# Altium PCB imx6_cpu_board.PcbDoc (part 8 of 9)
Units mil, origin at the board's own origin, x right, y up, seen from the top; angles counter-clockwise.
Board outline 2598.43 x 2362.2 mil, 8 copper layers (Top Layer, GND1, Signal Layer 1, POWER1, POWER2, Signal Layer 2, GND2, Bottom Layer), stack 66.304 mil thick; 354 components, 422 nets, 2180 pads, 1333 vias.
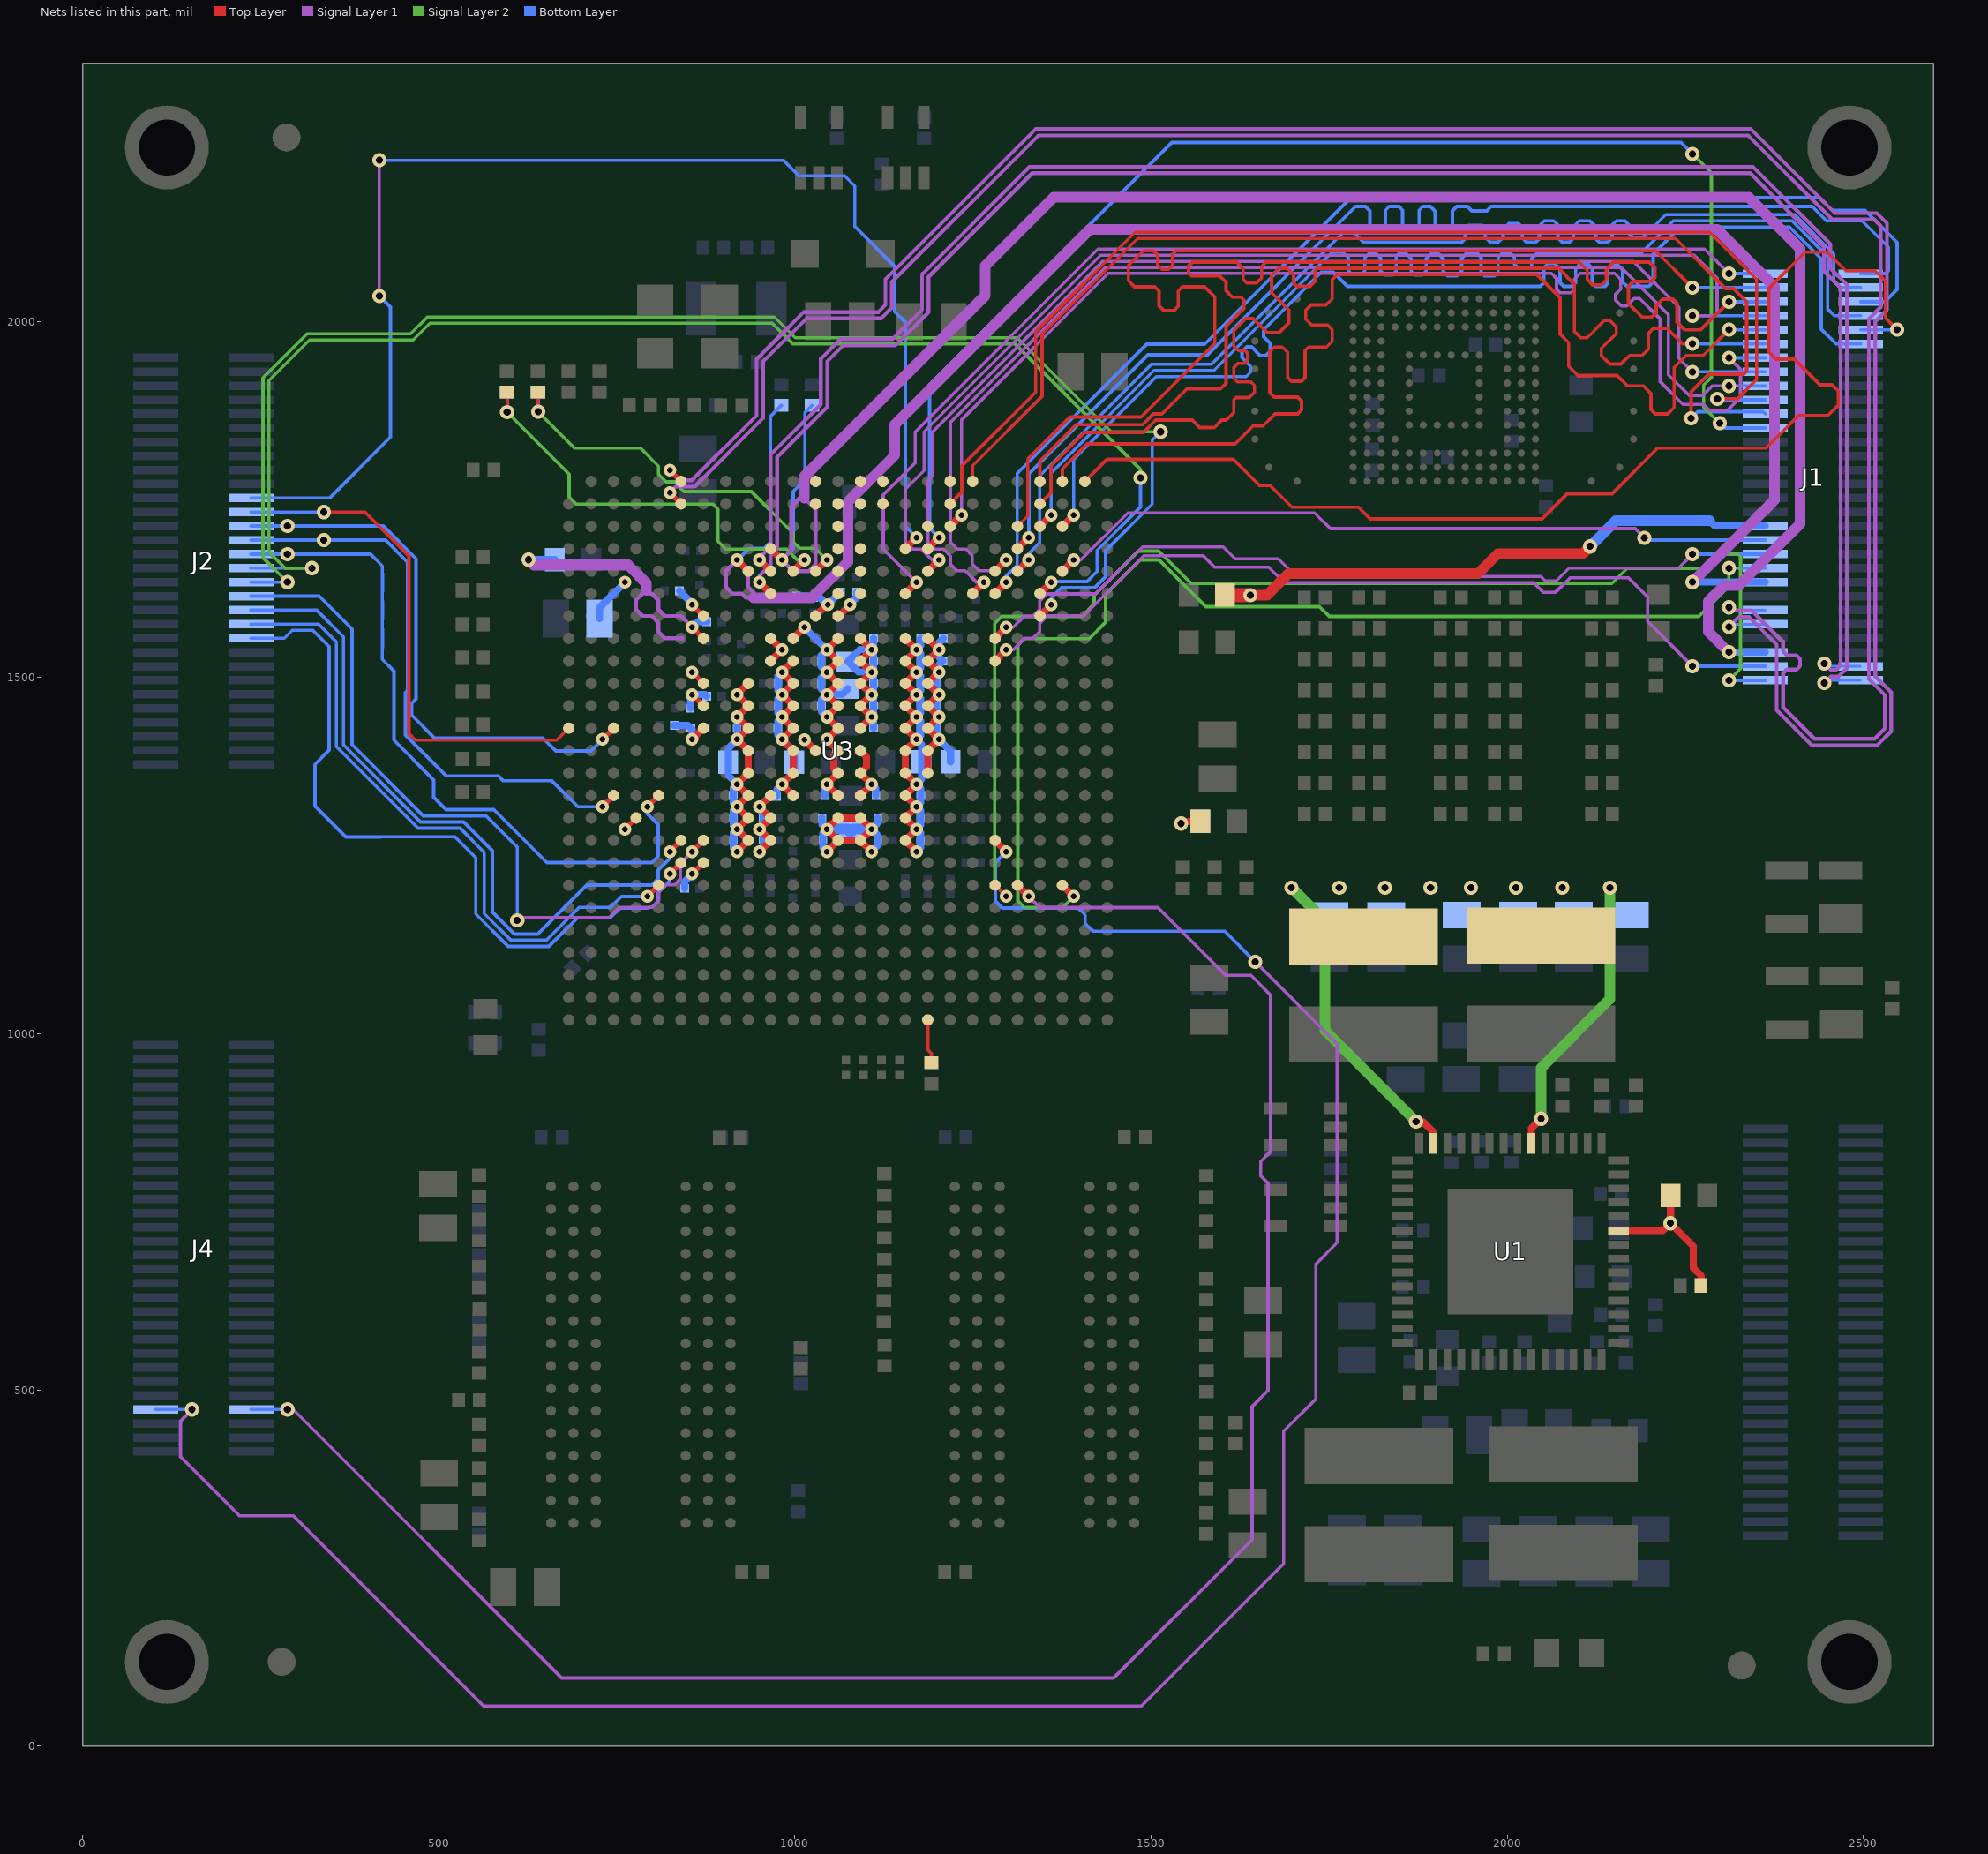
[diagram p14: the nets of this part, all layers, seen from the top]

## Via types
v1: diameter 18, hole 8, Top Layer to Bottom Layer, tented both sides, 768 vias
v2: diameter 20, hole 10, Top Layer to Bottom Layer, tented both sides, 565 vias

## Nets (pads, with @x,y where several pads share a name; then routed paths per layer and width w, separated by ;. In a path a pad name is that pad's centre, name@x,y a point inside that pad or via, vN(x,y) a via of type N, cw(c..) or ccw(c..) an arc to the next point about the centre after c; other vN are vias at no path point) (continued)
RGMII-TXCLK: J1.2 U3.D21 | length 1728.1
  Top Layer w10: U3.D21@1312.35,1680.8 v1(1328.1,1696.55)
  Bottom Layer w4.7: v1(1328.1,1696.55) 1328.1,1785.72 1495.38,1953 1579,1953 1787,2161 1801,2161 1807,2155 1807,2135 1813,2129 1823.46,2129 1829,2134.54 1829,2156 1834,2161 1848,2161 1853,2156 1853,2134 1859,2128 1869.46,2128 1876,2134.54 1876,2156 1881,2161 1892,2161 1898.58,2154.42 1898.58,2135.84 1905.42,2129 1916,2129 1923,2136 1923,2155 1929,2161 1944,2161 1950,2155 1971,2155 1977,2161 2428,2161 2448,2141 2498,2141 2535.03,2103.97 2535.03,2071.03 2530.93,2066.93 J1.2@2496.06,2066.93
RGMII-TXD0: J1.8 U3.C22 | length 1728.4
  Top Layer w10: U3.C22@1343.84,1712.3 v1(1359.59,1728.05)
  Bottom Layer w4.7: v1(1359.59,1728.05) 1359.59,1786.89 1503.8,1931.1 1588.1,1931.1 1754,2097 1769,2097 1777,2089 1777,2071.03 1782.33,2065.7 1794.7,2065.7 1800,2071 1800,2089 1806,2095 1816,2095 1822,2089 1822,2070.7 1827.7,2065 1838.2,2065 1844,2070.8 1844,2091 1848,2095 1857.97,2095 1865,2087.97 1865,2070 1870,2065 1880,2065 1886,2071 1886,2088 1893,2095 1903,2095 1910,2088 1910,2070 1916,2064 1929,2064 1935.86,2070.86 1935.86,2088.86 1942,2095 1958,2095 1963,2090 1963,2069 1968,2064 1982,2064 1987,2069 1987,2090 1992,2095 2005,2095 2010,2090 2010,2080 2015.65,2074.35 2030.35,2074.35 2034,2078 2034,2088 2041,2095 2186.95,2095 2233,2141.05 2399.72,2141.05 2449.52,2091.25 2449.52,2017.28 2458.93,2007.87 J1.8@2496.06,2007.87
RGMII-TXD1: J1.6 U3.F20 | length 1727.7
  Top Layer w10: U3.F20@1280.85,1617.81 v1(1296.6,1633.56)
  Bottom Layer w4.7: v1(1296.6,1633.56) 1296.6,1642.6 1311.95,1657.95 1311.95,1786.35 1493.6,1968 1575,1968 1781,2174 2437.73,2174 2455.73,2156 2502,2156 2547.24,2110.76 2547.24,2044.87 2529.93,2027.56 J1.6@2496.06,2027.56
RGMII-TXD2: J1.4 U3.E21 | length 1727.1
  Top Layer w10: U3.E21@1312.35,1649.31 v1(1328.1,1665.06)
  Bottom Layer w4.7: v1(1328.1,1665.06) 1328.1,1674.1 1343.45,1689.45 1343.45,1782.99 1500.27,1939.8 1584.5,1939.8 1769.7,2125 1784,2125 1798,2111 1936,2111 1941,2116 1941,2130 1945.54,2134.54 1964.46,2134.54 1969,2130 1969,2118 1976,2111 1987,2111 1994,2118 1994,2129 2002,2137 2016,2137 2021,2132 2021,2117 2027,2111 2040,2111 2045,2116 2045,2134 2052.05,2141.05 2064.95,2141.05 2071,2135 2071,2117 2077,2111 2087,2111 2093,2117 2093,2133 2101,2141 2115.54,2141 2124,2132.54 2124,2116 2129,2111 2141,2111 2147,2117 2147,2135.05 2152.95,2141 2165,2141 2172,2134 2172,2122 2177.85,2116.15 2188.75,2116.15 2222.3,2149.7 2403.3,2149.7 2458.4,2094.6 2458.4,2075.65 2458.22,2075.46 2458.22,2058.39 2458.4,2058.21 2458.4,2056.6 2467.76,2047.24 J1.4@2496.06,2047.24
RGMII-TXD3: J1.10 U3.A24 | length 1728.2
  Top Layer w4.7: U3.A24@1406.84,1775.29 1437.94,1806.39 1615.45,1806.39 1652.54,1769.3 1667.4,1769.3 1697.7,1739 1791,1739 1807.35,1722.65 2048.65,1722.65 2084,1758 2147,1758 2211,1822 2363.1,1822 2409.1,1868 2450,1868 2464.61,1882.61 2464.61,1902 2455.61,1911 2439,1911 2403,1947 2377,1947 2367,1957 2367,2046 2418,2097 2449,2097 2475,2071 2516,2071 2531,2056 2531,2004.43 v2(2547.24,1988.19)
  Bottom Layer w4.7: J1.10@2496.06,1988.19 v2(2547.24,1988.19)
RGMII-TXEN: J1.12 U3.C23 | length 1728.2
  Top Layer w10: U3.C23@1375.34,1712.3 v1(1391.09,1728.05)
  Bottom Layer w4.7: v1(1391.09,1728.05) 1391.09,1806.16 1507.33,1922.4 1633.4,1922.4 1639.5,1928.5 1639.5,1936.88 1627.35,1949.03 1627.35,1957.65 1633.85,1964.15 1640.87,1964.15 1653.02,1952 1661,1952 1667,1958 1667,1969 1657.7,1978.3 1657.7,1988 1738.7,2069 1755.6,2069 1775.6,2049 2046,2049 2051,2054 2051,2075 2057,2081 2066.75,2081 2074,2073.75 2074,2054 2079,2049 2091,2049 2096,2054 2096,2074 2102,2080 2113.75,2080 2119,2074.75 2119,2054 2124,2049 2137,2049 2141,2053 2141,2075 2145,2079 2154.93,2079 2162,2071.93 2162,2055 2168,2049 2198.65,2049 2204.72,2055.07 2204.72,2094.12 2243,2132.4 2396.13,2132.4 2440.82,2087.72 2440.82,1989.18 2461.5,1968.5 J1.12@2496.06,1968.5
RMII-PWR: J1.37 R9.1 | length 804.7
  Top Layer w15: v2(1639.2,1615.7) 1662.7,1615.7 1693,1646 1959,1646 1986.5,1673.5 2105.5,1673.5 v2(2116,1684)
  Top Layer w20: R9.1@1603.8,1615.7 v2(1639.2,1615.7)
  Bottom Layer w10: 2284,1720 2291.4,1712.6 J1.37@2362.2,1712.6
  Bottom Layer w15: v2(2116,1684) 2152,1720 2284,1720
SATA-RX_N: U3.A14
SATA-RX_P: U3.B14
SATA-TX_N: U3.B12
SATA-TX_P: U3.A12
SD2-CD-B: J1.1 U3.F16 | length 1585.3
  Top Layer w10: U3.F16@1154.87,1617.81 v1(1170.62,1633.56)
  Signal Layer 1 w4.5: v1(1170.62,1633.56) 1123.87,1680.31 1123.87,1756.49 1169,1801.62 1169,1844.88 1425.37,2101.25 2276.7,2101.25 v2(2311.02,2066.93)
  Bottom Layer w4.7: v2(2311.02,2066.93) J1.1@2362.2,2066.93
SD2-CLK: J1.3 U3.C21 | length 1662.6
  Top Layer w4.7: U3.C21@1312.35,1712.3 1326.7,1726.65 1326.7,1806.7 1385.9,1865.9 1485.85,1865.9 1589.45,1969.5 1589.45,2034 1574.88,2048.57 1544,2048.57 1538,2042.57 1538,2021 1532,2015 1518,2015 1511,2022 1511,2042.57 1505,2048.57 1476.46,2048.57 1468,2057.03 1468,2078 1489,2099 1503,2099 1509,2093 1509,2079 1515,2073 1524.39,2073 1530.37,2078.97 1530.37,2094.37 1535,2099 2208.09,2099 v2(2259.84,2047.24)
  Bottom Layer w4.7: v2(2259.84,2047.24) J1.3@2362.2,2047.24
SD2-CMD: J1.15 U3.F19 | length 1662.6
  Top Layer w10: U3.F19@1249.36,1617.81 v1(1265.11,1633.56)
  Signal Layer 1 w4.5: v1(1265.11,1633.56) 1255.18,1633.56 1238.93,1649.81 1227.29,1649.81 1218.36,1658.74 1218.36,1670.38 1208.43,1680.31 1196.78,1680.31 1186.86,1690.23 1186.86,1776.86 1193.27,1783.27 1193.27,1845.11 1432.42,2084.25 2176.52,2084.25 2241,2019.77 2241,1947.98 v2(2259.84,1929.13)
  Bottom Layer w4.7: v2(2259.84,1929.13) J1.15@2362.2,1929.13
SD2-DATA0: J1.5 U3.A22 | length 1662.5
  Top Layer w4.7: U3.A22@1343.84,1775.29 1343.84,1804.16 1394.68,1855 1487.87,1855 1502.82,1869.95 1514.95,1869.95 1550,1905 1597,1905 1605,1913 1605,1993 1630,2018 1630,2030 1626,2034 1614,2034 1605,2043 1605,2055 1596,2064 1557,2064 1552.62,2068.38 1552.62,2077.62 1558,2083 1620,2083 1629,2074 1629,2059 1634,2054 1648,2054 1655,2061 1655,2077 1661,2083 2100.75,2083 2112.18,2071.57 2112.18,2058.82 2120,2051 2132,2051 2139,2058 2139,2073 2149,2083 2199,2083 2207,2075 2207,2061.28 2201.72,2056 2177,2056 2170,2049 2170,2025 2189,2006 2203,2006 2209,2012 2209,2022 2218,2031 2232.39,2031 2238,2025.39 2238,1999 2248.81,1988.19 2271.65,1988.19 v2(2311.02,2027.56)
  Bottom Layer w4.7: v2(2311.02,2027.56) J1.5@2362.2,2027.56
SD2-DATA1: J1.17 U3.E20 | length 1661.9
  Top Layer w10: U3.E20@1280.85,1649.31 v1(1296.6,1665.06)
  Signal Layer 1 w4.5: v1(1296.6,1665.06) 1281.35,1649.81 1258.79,1649.81 1248.86,1659.74 1248.86,1671.38 1239.93,1680.31 1228.28,1680.31 1218.36,1690.23 1218.36,1858.17 1435.94,2075.75 2159.8,2075.75 2226.01,2009.54 2226.01,1924.99 2255,1896 2274.3,1896 2287.75,1909.45 v2(2311.02,1909.45)
  Bottom Layer w4.7: v2(2311.02,1909.45) J1.17@2362.2,1909.45
SD2-DATA2: J1.9 U3.A23 | length 1662
  Top Layer w4.7: U3.A23@1375.34,1775.29 1375.34,1793 1410.13,1827.79 1617.79,1827.79 1643,1853 1656.87,1853 1673.82,1869.95 1705.35,1869.95 1711,1875.6 1711,1888 1705.3,1893.7 1672.59,1893.7 1666.29,1900 1666.29,1957.41 1672.87,1964 1684,1964 1691.48,1956.52 1691.48,1921.52 1697,1916 1711,1916 1716,1921 1716,1959 1721,1964 1746,1964 1754,1972 1754,1988.19 1747.19,1995 1725,1995 1717,2003 1717,2015.48 1724.52,2023 1745.51,2023 1754,2031.49 1754,2058.5 1761.2,2065.7 2041.3,2065.7 2074,2033 2074,1982 2086,1970 2086,1937.15 2099.15,1924 2154,1924 2168.56,1909.44 2191,1909.44 2201.72,1898.73 2201.72,1876.28 2207.92,1870.08 2225.08,1870.08 2234,1879 2234,1935 2251.15,1952.15 2274.99,1952.15 v2(2311.02,1988.19)
  Bottom Layer w4.7: v2(2311.02,1988.19) J1.9@2362.2,1988.19
SD2-DATA3: J1.11 U3.B22 | length 1662.4
  Top Layer w4.7: U3.B22@1343.84,1743.8 1359.08,1759.04 1359.08,1796.72 1406.36,1844 1489.11,1844 1506.41,1861.3 1518.53,1861.3 1557.7,1861.3 1568,1851 1588.7,1851 1599,1861.3 1605.3,1861.3 1612,1868 1616,1872 1616,1890 1619,1893 1637.49,1893 1645,1900.51 1645,1910 1640,1915 1621,1915 1616,1920 1616,1935 1622,1941 1630.63,1941 1635.38,1945.75 1635.38,1955.12 1631.6,1958.9 1622.1,1958.9 1616,1965 1616,1987 1632.8,2003.8 1643.2,2003.8 1663,1984 1679.5,1984 1693,1997.5 1693,2016 1669,2040 1669,2064.25 1679.1,2074.35 1691,2074.35 1700,2065.35 1700,2053.61 1704.61,2049 1723,2049 1730,2056 1730,2071.35 1733,2074.35 2072,2074.35 2094,2052.35 2094,1986 2103,1977 2112,1977 2136,2001 2144,2001 2153,1992 2153,1983 2132,1962 2132,1952 2144.11,1939.89 2159.58,1939.89 2171.85,1952.15 2189,1952.15 2197.74,1960.89 2197.74,1982.93 2204.81,1990 2224.39,1990 2245.89,1968.5 v2(2259.84,1968.5)
  Bottom Layer w4.7: v2(2259.84,1968.5) J1.11@2362.2,1968.5
SD2-DATA4: J1.21 U3.A19 | length 1662.8
  Top Layer w4.7: U3.A19@1249.36,1775.29 1249.36,1797.36 1347,1895 1347,1982.39 1480.91,2116.3 2235.98,2116.3 2306.28,2046 2317.56,2046 2336,2027.56 2336,1930 2331.8,1925.8 2282.8,1925.8 2258,1901 v2(2258,1864)
  Bottom Layer w4.7: v2(2258,1864) 2267.35,1873.35 2358.93,1873.35 J1.21@2362.2,1870.08
SD2-DATA5: J1.19 U3.B18 | length 1662.2
  Top Layer w4.7: U3.B18@1217.86,1743.8 1234.3,1760.24 1234.3,1797.03 1338,1900.73 1338,1985.7 1477.3,2125 2284,2125 2350,2059 2350,1918.23 2322.77,1891 v2(2294.77,1891)
  Bottom Layer w4.7: v2@2296.01,1889.76 J1.19@2362.2,1889.76
SD2-DATA6: J1.7 U3.E17 | length 1662.4
  Top Layer w10: U3.E17@1186.36,1649.31 v1(1202.11,1665.06)
  Signal Layer 1 w4.5: v1(1202.11,1665.06) 1192.19,1665.06 1176.94,1680.31 1165.29,1680.31 1155,1690.61 1155,1764.52 1181,1790.52 1181,1844.85 1428.9,2092.75 2262.25,2092.75 2294.57,2060.43 2294.57,2011.1 2291.34,2007.87 v2(2259.84,2007.87)
  Bottom Layer w4.7: v2(2259.84,2007.87) J1.7@2362.2,2007.87
SD2-DATA7: J1.13 U3.C18 | length 1662.3
  Top Layer w10: U3.C18@1217.86,1712.3 v1(1233.61,1728.05)
  Signal Layer 1 w4.5: v1(1233.61,1728.05) 1233.61,1861.4 1439.46,2067.25 2062,2067.25 2069,2060.25 2069,2045 2074,2040 2089,2040 2094,2045 2094,2059.25 2102,2067.25 2150.54,2067.25 2159,2058.79 2159,2045 2152,2038 2152,2029.48 2159.69,2021.79 2167.79,2021.79 2178,2032 2185.79,2032 2214.63,2003.16 2214.63,1915.29 2246.6,1883.32 2275.63,1883.32 2284.2,1874.75 2308.77,1874.75 2327.27,1893.25 2327.27,1932.57 v2(2311.02,1948.82)
  Bottom Layer w4.7: v2(2311.02,1948.82) J1.13@2362.2,1948.82
SD2-WP: J1.23 U3.D17 | length 1930.5
  Top Layer w10: U3.D17@1186.36,1680.8 v1(1202.11,1696.55)
  Signal Layer 2 w4.5: v2(2260,2235) 2286.47,2208.53 2286.47,1921.47 2275.47,1910.47 2275.39,1910.47 2275.39,1879.61 v2(2298,1857)
  Bottom Layer w4.7: v1(1202.11,1696.55) 1189,1709.66 1189,1910.93 1529.07,2251 2244,2251 v2(2260,2235) ; v2(2298,1857) 2304.61,1850.39 J1.23@2362.2,1850.39
SD3-CD-B: U3.A18
SD3-CLK: U3.D14
SD3-CMD: U3.B13
SD3-DATA0: U3.E14
SD3-DATA1: U3.F14
SD3-DATA2: U3.A15
SD3-DATA3: U3.B15
SD3-DATA4: U3.D13
SD3-DATA5: U3.C13
SD3-DATA6: U3.E13
SD3-DATA7: U3.F13
SD3-WP: U3.C17
TAMPER: R45.1 R64.2 U3.E11 | length 627
  Top Layer w4.7: v2(595.86,1872.45) R45.1@595.86,1900.59
  Top Layer w10: U3.E11@997.39,1649.31 v1(1013.14,1665.06)
  Signal Layer 2 w4.5: v2(595.86,1872.45) 682.82,1785.49 682.82,1753.19 692.76,1743.25 884.74,1743.25 891.84,1736.16 891.84,1691.16 902.74,1680.26 987.92,1680.26 1003.12,1665.06 v1(1013.14,1665.06)
  Bottom Layer w4.7: v2(595.86,1872.45) R64.2@595.86,1900.59
TEST-MODE: R44.1 R67.2 U3.E12 | length 582.5
  Top Layer w4.5: v2@639.17,1873.25 v2(639.42,1873)
  Top Layer w4.7: v2@639.17,1873.25 R44.1@639.17,1900.59
  Top Layer w10: U3.E12@1028.88,1649.31 v1(1044.63,1665.06)
  Signal Layer 2 w4.5: v2(639.42,1873) 690.42,1822 783.2,1822 808.44,1796.76 808.44,1785.27 818.95,1774.75 830.45,1774.75 844.21,1761 938.69,1761 997.95,1701.74 997.95,1690.26 1006.85,1681.35 1028.34,1681.35 v1(1044.63,1665.06)
  Bottom Layer w4.7: R67.2@639.17,1900.59 639.17,1873.25 v2(639.42,1873)
UART1-RXD: J2.26 U3.M3 | length 790.5
  Top Layer w7: v1(729.67,1413.09) U3.M3@745.42,1428.84
  Bottom Layer w4.7: J2.26@236.22,1712.6 v2(287.4,1712.6) 421.95,1712.6 468,1666.55 468,1469.82 461.65,1463.47 461.65,1447.35 494,1415 646.14,1415 664.2,1396.94 713.52,1396.94 v1(729.67,1413.09)
UART1-TXD: J2.24 U3.M1 | length 731.8
  Top Layer w4.7: v2(338.58,1732.28) 396.29,1732.28 458,1670.57 458,1421.16 467,1412.16 665.74,1412.16 U3.M1@682.43,1428.84
  Bottom Layer w4.7: J2.24@236.22,1732.28 v2(338.58,1732.28)
UART2-RXD: J2.30 U3.R5 | length 1001
  Top Layer w7: v1(792.66,1318.6) U3.R5@808.41,1334.35
  Bottom Layer w4.7: J2.30@236.22,1673.23 v2(287.4,1673.23) 404.08,1673.23 420.65,1656.66 420.65,1646.23 420.75,1646.13 420.75,1620.87 420.65,1620.77 420.65,1607.23 420.75,1607.13 420.75,1581.68 420.65,1581.58 420.65,1568.03 420.75,1567.93 420.75,1542.31 420.65,1542.21 420.65,1525.35 437,1509 437,1412 492.93,1356.07 492.93,1331.83 510.11,1314.65 577.24,1314.65 651.63,1240.26 799.01,1240.26 808.01,1249.25 808.01,1293.46 792.66,1308.81 v1(792.66,1318.6)
UART2-TXD: J2.28 U3.R3 | length 817.4
  Top Layer w7: v1(729.67,1318.6) U3.R3@745.42,1334.35
  Bottom Layer w4.7: J2.28@236.22,1692.91 v2(338.58,1692.91) 425.09,1692.91 456,1662 456,1482 452.95,1478.95 452.95,1419.05 510,1362 583.42,1362 590.47,1354.95 658.89,1354.95 695.24,1318.6 v1(729.67,1318.6)
UART3-RXD: J2.34 U3.G22 | length 2070.3
  Top Layer w10: U3.G22@1343.84,1586.32 v1(1359.59,1602.07)
  Signal Layer 2 w4.5: v2(287.4,1633.86) 253.1,1668.16 253.1,1920.38 315.1,1982.37 460.37,1982.37 484,2006 971.29,2006 1000.33,1976.96 1312,1976.96 1443.96,1845 v2(1513.16,1845)
  Bottom Layer w4.7: J2.34@236.22,1633.86 v2(287.4,1633.86) ; v1(1359.59,1602.07) 1359.59,1611.85 1373.86,1626.12 1420.54,1626.12 1436,1641.58 1436,1678.09 1501.35,1743.44 1501.35,1833.19 v2(1513.16,1845)
UART3-TXD: J2.32 U3.F22 | length 1999.7
  Top Layer w10: U3.F22@1343.84,1617.81 v1(1359.59,1633.56)
  Signal Layer 2 w4.5: v2(322,1653.54) 284.11,1653.54 261.55,1676.1 261.55,1916.88 318.55,1973.87 463.89,1973.87 487.52,1997.5 967.77,1997.5 996.81,1968.46 1308.48,1968.46 1485,1791.94 v2(1485,1780.34)
  Bottom Layer w4.7: J2.32@236.22,1653.54 v2(322,1653.54) ; v1(1359.59,1633.56) 1360.85,1634.82 1410,1634.82 1424,1648.82 1424,1678.39 1485,1739.39 v2(1485,1780.34)
UART4-RXD: J2.42 U3.V6 | length 1059.3
  Top Layer w7: v1(824.16,1224.11) U3.V6@839.91,1239.86
  Bottom Layer w4.7: J2.42@236.22,1555.12 283,1555.12 294.18,1566.3 323,1566.3 346,1543.3 346,1397.95 326,1377.95 326,1319.65 369.7,1275.95 418.05,1275.95 418.45,1276.35 522.6,1276.35 552,1246.95 552,1168.12 597.6,1122.52 654.6,1122.52 695.08,1163 741.34,1163 754.81,1176.47 794.21,1176.47 795,1177.26 799.01,1177.26 808.01,1186.25 808.01,1198.18 824.16,1214.33 v1(824.16,1224.11)
UART4-TXD: J2.40 U3.W5 | length 924.3
  Top Layer w7: v1(792.66,1192.61) U3.W5@808.41,1208.36
  Bottom Layer w4.7: J2.40@236.22,1574.8 236.37,1574.95 331.05,1574.95 356.12,1549.88 356.12,1403.15 470.72,1288.55 529.78,1288.55 563.77,1254.56 563.77,1168.65 601.2,1131.22 651,1131.22 697.05,1177.27 741,1177.27 756.34,1192.61 v1(792.66,1192.61)
UART5-RXD: J2.38 U3.U6 | length 998.2
  Top Layer w7: v1(824.16,1255.61) U3.U6@839.91,1271.36
  Bottom Layer w4.7: J2.38@236.22,1594.49 328.51,1594.49 366,1557 366,1405.57 474.32,1297.25 534.75,1297.25 575.25,1256.75 575.25,1170.66 605.91,1140 639,1140 707.76,1208.76 799.01,1208.76 808.01,1217.75 808.01,1229.67 824.16,1245.82 v1(824.16,1255.61)
UART5-TXD: J2.36 U3.U7 | length 1045.2
  Top Layer w7: v1(855.65,1255.61) U3.U7@871.4,1271.36
  Signal Layer 1 w4.5: v2(610.04,1159) 614.04,1163 739,1163 753.37,1177.37 755.85,1177.37 799.11,1177.36 808.91,1187.16 808.91,1198.94 818.83,1208.86 830.47,1208.86 839.41,1217.79 839.41,1239.35 v1(855.65,1255.61)
  Bottom Layer w4.7: J2.36@236.22,1614.17 332,1614.17 378,1568.17 378,1405.88 477.93,1305.95 566.05,1305.95 610.04,1261.96 v2(610.04,1159)
USB-H1-OC: J1.57 U3.J20 | length 1250.6
  Top Layer w10: U3.J20@1280.85,1523.32 v1(1296.6,1539.07)
  Signal Layer 1 w4.5: v1(1296.6,1539.07) 1306.52,1539.07 1322.76,1555.31 1334.4,1555.31 1343.35,1564.26 1343.35,1575.9 1354.27,1586.82 1405.52,1586.82 1489.7,1671 1573,1671 1589,1655 1665,1655 1687,1633 2036.83,1633 2050.08,1619.75 2067.91,1619.75 2088.16,1640 2169.96,1640 2197,1612.96 2197,1578.59 v2(2259.84,1515.75)
  Bottom Layer w4.7: v2(2259.84,1515.75) J1.57@2362.2,1515.75
USB-HOST-VBUS: C121.1 J1.55 U3.D10 | length 2857.6
  Top Layer w10: U3.D10@965.89,1680.8 v1(981.64,1665.05)
  Signal Layer 1 w5.4: v1(981.64,1665.05) 997.33,1649.36 1019.64,1649.36 1028.85,1658.56 1028.85,1736.15 1013.15,1751.85
  Signal Layer 1 w6: v1(981.64,1665.05) 994.83,1678.24 994.83,1739.83 1006.85,1751.85 1013.15,1751.85
  Signal Layer 1 w15: 1013.15,1751.85 1013.15,1782.15 1267,2036 1267,2078 1363,2174 2339,2174 2411,2102 2411,1715.42 2324.58,1629 2304,1629 2282,1607 2282,1564.46 v2(2311.02,1535.43)
  Bottom Layer w4.7: v1(981.64,1665.05) 997.38,1680.79 997.38,1761.38 1014,1778 1014,1872.07 C121.1@1023.84,1881.91
  Bottom Layer w10: v2(2311.02,1535.43) J1.55@2362.2,1535.43
USB-HOST_N: J1.58 U3.F10 | length 2632.1
  Top Layer w10: v1(950.14,1633.56) U3.F10@965.89,1617.81
  Signal Layer 1 w5.3: v1(950.14,1633.56) 950.14,1642.69 966.04,1658.59 966.04,1671.51 975,1680.47 975,1809.27 1045.4,1879.67 1045.4,1943.88 1067.52,1966 1140.73,1966 1187.4,2012.67 1187.4,2062.4 1333,2208 2341,2208 2444.5,2104.5 2444.5,2070.5 2468,2047 2468,1517.4 2461,1510.4 2454.19,1510.4 v2(2444.88,1519.72)
  Bottom Layer w3.7: v2(2444.88,1519.72) 2448.85,1515.75 J1.58@2496.06,1515.75
USB-HOST_P: J1.60 U3.E10 | length 2641.6
  Top Layer w10: v1(950.14,1665.06) U3.E10@965.89,1649.31
  Signal Layer 1 w5.3: v1(950.14,1665.06) 950.14,1668.34 966,1684.2 966,1813 1036.4,1883.4 1036.4,1947.6 1063.8,1975 1137,1975 1178.4,2016.4 1178.4,2066.13 1178.88,2066.61 1329.27,2217 2344.73,2217 2450.86,2110.86 2453.5,2108.23 2453.5,2074.23 2477,2050.73 2477,1513.68 2464.73,1501.4 2454.19,1501.4 v2(2444.88,1492.09)
  Bottom Layer w3.7: v2(2444.88,1492.09) 2448.85,1496.06 J1.60@2496.06,1496.06
USB-OTG-ID: J1.43 U3.W23 | length 1667.4
  Top Layer w10: U3.W23@1375.34,1208.36 v1(1391.09,1192.61)
  Signal Layer 2 w4.5: v1(1391.09,1192.61) 1375.84,1177.36 1321.78,1177.36 1312.84,1186.3 1312.84,1545.39 1321.78,1554.32 1412.7,1554.32 1436,1577.62 1436,1616.79 1484.27,1665.06 1510.94,1665.06 1576.55,1599.45 1736.26,1599.45 1750,1585.71 2268.71,1585.71 2311.02,1628.02 v2(2311.02,1653.54)
  Bottom Layer w4.7: v2(2311.02,1653.54) J1.43@2362.2,1653.54
USB-OTG-OC: J1.41 U3.H20 | length 1176.8
  Top Layer w10: U3.H20@1280.85,1554.82 v1(1296.6,1570.57)
  Signal Layer 1 w4.5: v1(1296.6,1570.57) 1306.15,1570.57 1321.4,1585.82 1333.82,1585.82 1343.63,1595.63 1343.63,1607.67 1353.27,1617.32 1421.82,1617.32 1487.71,1683.21 1601.06,1683.21 1617.82,1666.45 1678.55,1666.45 1703,1642 2047.02,1642 2053.27,1635.75 2068.75,1635.75 2086.54,1653.54 2240.16,1653.54 v2(2259.84,1673.23)
  Bottom Layer w4.7: v2(2259.84,1673.23) J1.41@2362.2,1673.23
USB-OTG-PWREN: J1.39 U3.E23 | length 1036.6
  Top Layer w10: U3.E23@1375.34,1649.31 v1(1391.09,1665.06)
  Signal Layer 1 w4.5: v1(1391.09,1665.06) 1401.06,1665.06 1467.15,1731.15 1729.35,1731.15 1751.5,1709 2179.51,1709 v2(2192.51,1696)
  Bottom Layer w4.7: v2@2195.6,1692.91 J1.39@2362.2,1692.91
  Bottom Layer w10: v2(2192.51,1696) v2@2195.6,1692.91
USB-OTG-VBUS: C111.1 J1.45 U3.E9 | length 2749.9
  Top Layer w10: v1(918.65,1665.06) U3.E9@934.4,1649.31
  Signal Layer 1 w5.4: 902.95,1627.06 912.15,1617.86 925.06,1617.86 930.93,1612 941.94,1612 941.94,1619.56 934.44,1627.06 934.44,1649.27 v1(918.65,1665.06) 902.95,1649.36 902.95,1627.06
  Signal Layer 1 w15: 941.94,1612 1024,1612 1074.12,1662.12 1074.12,1746.12 1140.13,1812.13 1140.13,1855.29 1413.84,2129 2294.57,2129 2375,2048.57 2375,1749.02 v2(2259.84,1633.86)
  Bottom Layer w4.7: v1(918.65,1665.06) 919.44,1665.06 935.58,1681.2 956.51,1681.2 965.51,1690.19 965.51,1866.49 C111.1@980.93,1881.91
  Bottom Layer w10: v2(2259.84,1633.86) J1.45@2362.2,1633.86
USB-OTG_N: J1.49 U3.B6 | length 3215.2
  Top Layer w7: v1(824.16,1759.55) U3.B6@839.91,1743.8
  Signal Layer 1 w5.3: v1(824.16,1759.55) 832.6,1768 859.11,1768 955,1863.89 955,1943 1016,2004 1120.71,2004 1135.92,2019.21 1135.92,2055.19 1341.73,2261 2338,2261 2456,2143 2515,2143 2524,2134 2524,2019.81 2507.49,2003.3 2507.49,1497.87 2529.8,1475.57 2529.8,1428.13 2515.67,1414 2431,1414 2387,1458 2387,1506 2392,1511 2406,1511 2411,1516 2411,1526 2406,1531 2393,1531 2387,1537 2387,1550 2343,1594 2315.48,1594 v2(2311.02,1598.46)
  Bottom Layer w3.7: v2(2311.02,1598.46) 2314.99,1594.49 J1.49@2362.2,1594.49
USB-OTG_P: J1.51 U3.A6 | length 3215.7
  Top Layer w7: v1(824.16,1791.04) U3.A6@839.91,1775.29
  Signal Layer 1 w5.3: v1(824.16,1791.04) 838.2,1777 855.38,1777 946,1867.62 946,1946.73 971.27,1972 1012.27,2013 1116.98,2013 1126.92,2022.94 1126.92,2058.92 1338,2270 2341.73,2270 2459.73,2152 2518.73,2152 2533,2137.73 2533,2016.08 2516.49,1999.57 2516.49,1501.6 2538.8,1479.3 2538.8,1424.4 2519.4,1405 2427.27,1405 2380.64,1451.64 2378,1454.27 2378,1546.27 2339.27,1585 2325.19,1585 v2(2311.02,1570.83)
  Bottom Layer w3.7: v2(2311.02,1570.83) 2314.99,1574.8 J1.51@2362.2,1574.8
USB_H1_PWR_EN: J1.59 U3.W20 | length 1777.6
  Top Layer w4.7: U3.W20@1280.85,1208.36 v1(1296.6,1192.62)
  Signal Layer 2 w4.5: v1(1296.6,1192.62) 1280.36,1208.86 1280.36,1575.9 1290.28,1585.82 1402.82,1585.82 1420,1603 1420,1615.5 1482,1677.5 1510.52,1677.5 1556.07,1631.95 2146.64,1631.95 2167.69,1653 2274.62,1653 2294.85,1673.23 2323.77,1673.23 2327.27,1669.73 2327.27,1512.31 v2(2311.02,1496.06)
  Bottom Layer w4.7: v2(2311.02,1496.06) J1.59@2362.2,1496.06
VADC1-INT: J4.54 U3.W21 | length 2844.7
  Top Layer w10: U3.W21@1312.35,1208.36 v1(1328.1,1192.61)
  Signal Layer 1 w4.5: v2(287.4,472.44) 295.56,472.44 672.4,95.6 1447.31,95.6 1641.63,289.93 1641.63,476.63 1664,499 1664,790.19 1653.81,800.38 1653.81,820.66 1667.66,834.51 1667.66,1054.22 1640,1081.88 1604.49,1081.88 1509.38,1177 1343.71,1177 v1(1328.1,1192.61)
  Bottom Layer w4.7: J4.54@236.22,472.44 v2(287.4,472.44)
VADC2-INT: J4.53 U3.U20 | length 3329.5
  Top Layer w10: U3.U20@1280.85,1271.36 v1(1296.6,1255.61)
  Signal Layer 1 w4.5: v2(153.54,472.44) 137.29,456.19 137.29,406.18 220.47,323 296,323 563,56 1486,56 1686,256 1686,442 1731,487 1731,676.59 1761,706.59 1761,986 v2(1646,1101)
  Bottom Layer w4.7: J4.53@102.36,472.44 v2(153.54,472.44) ; v1(1296.6,1255.61) 1281.25,1240.26 1281.25,1186.27 1291.04,1176.47 1397.45,1176.47 1407.23,1166.69 1407.23,1154.77 1418,1143.99 1603.01,1143.99 v2(1646,1101)
VCOREDIG: C2.1 R5.1 U1.51 | length 221.5
  Top Layer w10: U1.51@2156.02,723.67 2218.54,723.67 v2(2228.77,733.9) ; C2.1@2229.17,772.88 2229.17,734.3 v2(2228.77,733.9) ; R5.1@2272.08,646.5 2272.08,660.05 2261,671.14 2261,701.68 v2(2228.77,733.9)
VDDARM-CAP: C38.1 C39.1 C40.1 C41.1 C42.1 C50.1 C51.1 C52.1 C53.1 C54.1 U3.H11 U3.H13 U3.J11 U3.J13 U3.K11 U3.K13 U3.L11 U3.L13 U3.M11 U3.M13 U3.N11 U3.N13 U3.P11 U3.P13 U3.R11 U3.R13 | length 994.3
  Top Layer w10: U3.R11@997.39,1334.35 v1(981.64,1350.1) U3.P11@997.39,1365.84 U3.N11@997.39,1397.34 v1(981.64,1413.09) U3.M11@997.39,1428.84 v1(981.64,1444.58) U3.L11@997.39,1460.33 v1(981.64,1476.08) U3.K11@997.39,1491.83 v1(981.64,1507.58) U3.J11@997.39,1523.32 ; U3.H11@997.39,1554.82 v1(1013.15,1570.57) ; U3.R13@1060.38,1334.35 v1(1044.63,1350.1) U3.P13@1060.38,1365.84 1054.38,1371.84 1054.38,1391.34 U3.N13@1060.38,1397.34 v1(1044.63,1413.09) U3.M13@1060.38,1428.84 v1(1044.63,1444.58) U3.L13@1060.38,1460.33 v1(1044.63,1476.08) U3.K13@1060.38,1491.83 v1(1044.63,1507.58) U3.J13@1060.38,1523.32 v1(1044.63,1539.07) U3.H13@1060.38,1554.82
  Bottom Layer w10: C51.1@974.38,1333 974.38,1342.84 v1(981.64,1350.1) 999.09,1367.55 C42.1@999.09,1381.12 999.09,1395.64 v1(981.64,1413.09) 975.81,1418.92 C53.1@975.81,1428.76 975.81,1438.76 v1(981.64,1444.58) 976.2,1450.02 C40.1@976.2,1460.26 976.2,1470.65 v1(981.64,1476.08) 976.2,1481.52 C52.1@976.2,1491.75 976.2,1502.15 v1(981.64,1507.58) ; v1(1013.15,1570.57) v1(1044.63,1539.07) 1036.83,1531.28 C39.1@1036.83,1523.25 1036.83,1515.38 v1(1044.63,1507.58) 1036.83,1499.79 C38.1@1036.83,1491.75 1036.83,1483.88 v1(1044.63,1476.08) ; C50.1@1042.24,1333.85 1042.24,1347.71 v1(1044.63,1350.1) ; v1(1044.63,1444.58) 1037.23,1451.98 C41.1@1037.23,1460.26 1037.23,1468.68 v1(1044.63,1476.08) ; C54.1@1074.24,1483.88 1066.44,1476.08 v1(1044.63,1476.08)
VDDARM-SW1AB: C14.1 C15.1 C16.1 C17.1 C43.1 C44.1 C45.1 C46.1 C47.1 C48.1 C49.1 C55.1 C56.1 C57.1 C58.1 C59.1 L2.2 U1.6 U3.H14 U3.J14 U3.K9 U3.K14 U3.L9 U3.L14 U3.M9 U3.M14 U3.N9 U3.N14 U3.P9 U3.P14 U3.R9 U3.R14 U3.T9 U3.U9 | length 1432.2
  Top Layer w10: v1(918.65,1255.61) U3.U9@934.4,1271.36 v1(918.65,1287.1) U3.T9@934.4,1302.85 v1(918.65,1318.6) U3.R9@934.4,1334.35 v1(918.65,1350.1) U3.P9@934.4,1365.84 U3.N9@934.4,1397.34 v1(918.65,1413.09) U3.M9@934.4,1428.84 v1(918.65,1444.58) U3.L9@934.4,1460.33 v1(918.65,1476.08) U3.K9@934.4,1491.83 ; U3.R14@1091.88,1334.35 v1(1107.62,1350.1) ; U3.N14@1091.88,1397.34 1100.38,1388.84 1100.38,1374.34 U3.P14@1091.88,1365.84 v1(1107.62,1350.1) ; U3.M14@1091.88,1428.84 v1(1107.62,1444.58) U3.L14@1091.88,1460.33 v1(1107.62,1476.08) U3.K14@1091.88,1491.83 v1(1107.62,1507.58) U3.J14@1091.88,1523.32 v1(1107.62,1539.07) U3.H14@1091.88,1554.82 ; U1.6@2033.9,845.79 2033.9,867.29 v2(2047.28,880.67)
  Signal Layer 2 w15: v2(2047.28,880.67) 2047.28,951.91 2143.85,1048.48 v2(2143.85,1205)
  Bottom Layer w10: v1(918.65,1255.61) 913.61,1260.66 C58.1@913.61,1271.28 913.61,1282.06 v1(918.65,1287.1) 913.61,1292.15 C57.1@913.61,1302.78 913.61,1313.56 v1(918.65,1318.6) 913.21,1324.04 C44.1@913.21,1334.27 913.21,1344.67 v1(918.65,1350.1) 906.28,1362.48 C49.1@906.28,1381.12 906.28,1400.72 v1(918.65,1413.09) 918.72,1413.17 C43.1@918.72,1428.76 918.72,1444.51 v1(918.65,1444.58) ; v1(1107.62,1350.1) 1113.61,1344.12 C56.1@1113.61,1334.27 ; C45.1@1110.3,1428.76 1110.3,1441.9 v1(1107.62,1444.58) 1110.3,1447.27 C47.1@1110.3,1460.26 1110.3,1473.4 v1(1107.62,1476.08) 1110.3,1478.77 C48.1@1110.3,1491.75 1110.3,1504.9 v1(1107.62,1507.58) ; C55.1@1110.3,1554.75 1110.3,1541.76 v1(1107.62,1539.07) ; v1(1107.62,1507.58) 1089.11,1507.58 C59.1@1074.24,1522.46 1090.85,1539.07 v1(1107.62,1539.07) ; v1(1107.62,1507.58) 1110.3,1510.27 C46.1@1110.3,1523.25 1110.3,1536.39 v1(1107.62,1539.07)
  other v2: 1949,1205 2012,1205 2077.09,1205
VDDHIGH-CAP: C87.1 C88.1 C89.1 C94.2 C110.1 C116.1 C123.1 C125.1 U3.G7 U3.G12 U3.H10 U3.J10 U3.K7 U3.M7 U3.V7 | length 389.9
  Top Layer w7: v1(855.65,1224.11) U3.V7@871.4,1239.86 ; v1(855.65,1507.58) U3.K7@871.4,1491.83 ; v1(855.65,1602.07) U3.G7@871.4,1586.32
  Top Layer w10: v1(855.65,1413.09) U3.M7@871.4,1428.84 ; U3.J10@965.89,1523.32 v1(981.65,1539.07) U3.H10@965.89,1554.82 ; U3.G12@1028.88,1586.32 1044.63,1602.07 v1(1046,1602) v1(1046,1602)
  Bottom Layer w10: C89.1@725.81,1582.7 725.81,1598.21 v1(761.17,1633.56) ; C116.1@830.54,1432.7 849.83,1432.7 C87.1@853.76,1428.76 855.65,1426.88 v1(855.65,1413.09) ; C125.1@837.62,1621.67 855.65,1603.65 v1(855.65,1602.07) ; C123.1@845.1,1203.96 845.1,1213.57 v1(855.65,1224.11) ; C94.2@1002.34,1614.19 1024.24,1614.19 C88.1@1026.2,1612.23 1034.48,1612.23 1044.7,1602 1045.9,1602 v1(1046,1602) C110.1@1064,1620.1
VDDPU-CAP: C78.1 C79.1 C80.1 C81.1 C82.1 C83.1 U3.H17 U3.J17 U3.K17 U3.L17 U3.M17 U3.N17 U3.P17 | length 448.9
  Top Layer w10: U3.P17@1186.36,1365.84 U3.N17@1186.36,1397.34 v1(1202.11,1413.09) U3.M17@1186.36,1428.84 v1(1202.11,1444.58) U3.L17@1186.36,1460.33 v1(1202.11,1476.08) U3.K17@1186.36,1491.83 v1(1202.11,1507.58) U3.J17@1186.36,1523.32 v1(1202.11,1539.07) U3.H17@1186.36,1554.82
  Bottom Layer w10: C78.1@1208.09,1554.75 1202.11,1548.76 v1(1202.11,1539.07) 1202.11,1528.84 C80.1@1207.7,1523.25 1202.11,1517.66 v1(1202.11,1507.58) 1199.04,1504.52 C81.1@1199.04,1491.75 1199.04,1479.15 v1(1202.11,1476.08) 1199.04,1473.02 C82.1@1199.04,1460.26 1199.04,1447.65 v1(1202.11,1444.58) 1199.04,1441.52 C79.1@1199.04,1428.76 1199.04,1416.16 v1(1202.11,1413.09) 1218.33,1396.87 C83.1@1218.33,1381.52
VDDSOC-CAP: C60.1 C61.1 C62.1 C63.1 C64.1 C65.1 C66.1 C86.1 C109.1 C113.1 C122.1 L5.1 U3.G13 U3.H7 U3.L7 U3.N12 U3.R10 U3.T10 U3.T13 U3.T14 U3.U10 U3.U13 U3.U14 | length 1179.1
  Top Layer w7: v1(855.65,1476.08) U3.L7@871.4,1460.33 ; v1(855.65,1570.57) U3.H7@871.4,1554.82
  Top Layer w10: v1(950.14,1255.61) U3.U10@965.89,1271.36 v1(950.14,1287.1) U3.T10@965.89,1302.85 v1(950.14,1318.6) U3.R10@965.89,1334.35 ; v1(1013.14,1412.85) 1028.65,1397.34 U3.N12@1028.88,1397.34 ; v1(1044.63,1255.61) U3.U13@1060.38,1271.36 ; U3.G13@1060.38,1586.32 1061.61,1586.32 v1(1077.24,1601.96) ; v1(1107.62,1255.61) U3.U14@1091.88,1271.36 ; U3.U13@1060.38,1271.36 U3.U14@1091.88,1271.36 ; U3.U13@1060.38,1271.36 v1(1044.63,1287.1) U3.T13@1060.38,1302.85 U3.T14@1091.88,1302.85 v1(1107.62,1287.1) U3.U14@1091.88,1271.36
  Signal Layer 1 w5.5: 842,1554.58 841.71,1554.87 817.66,1554.87 808.46,1564.07 808.46,1576.97 799.06,1586.37 786.16,1586.37 776.96,1595.57 776.96,1608.58 786.16,1617.77 786.63,1617.77 791.38,1622.52 796.13,1617.77 799.16,1617.77 808.46,1608.48 808.46,1595.57 817.66,1586.37 839.85,1586.37 v1(855.65,1570.57)
  Signal Layer 1 w15: v2(625.81,1665.38) 633.19,1658 765.65,1658 791.38,1632.27 791.38,1622.52
  Bottom Layer w10: v2(625.81,1665.38) L5.1@662.82,1665.38 ; C113.1@852.98,1456.71 852.98,1473.41 v1(855.65,1476.08) 873.76,1476.08 C86.1@876.2,1473.64 ; v1(855.65,1570.57) 863.44,1578.37 C122.1@876.2,1578.37 ; v1(950.14,1255.61) 955.34,1260.81 C61.1@955.34,1271.28 955.34,1281.9 v1(950.14,1287.1) 955.34,1292.3 C63.1@955.34,1302.78 955.34,1313.4 v1(950.14,1318.6) ; C60.1@1038.02,1303.17 1038.02,1293.72 v1(1044.63,1287.1) 1039.2,1281.67 C62.1@1039.2,1271.28 1039.2,1261.05 v1(1044.63,1255.61) ; v1@1076.24,1601.96 1076.74,1602.46 1086.83,1612.55 C109.1@1086.83,1620.1 ; v1(1107.62,1255.61) 1115.97,1263.96 C65.1@1115.97,1271.28 1115.97,1278.75 v1(1107.62,1287.1) 1115.97,1295.45 C64.1@1115.97,1302.78
  Bottom Layer w15: v1(1044.63,1287.1) 1073.77,1287.1 C66.1@1078.17,1282.7 1082.58,1287.1 v1(1107.62,1287.1)
VDDSOC-SW1C: C28.1 C29.1 C67.1 C68.1 C69.1 C70.1 C71.1 C72.1 C73.1 C74.1 C75.1 C76.1 C77.1 L3.2 U1.13 U3.H16 U3.J16 U3.K16 U3.L16 U3.M16 U3.N16 U3.P16 U3.R16 U3.T16 U3.U16 | length 1254
  Top Layer w10: U3.H16@1154.87,1554.82 v1(1170.62,1539.07) U3.J16@1154.87,1523.32 v1(1170.62,1507.58) U3.K16@1154.87,1491.83 v1(1170.62,1476.08) U3.L16@1154.87,1460.33 v1(1170.62,1444.58) U3.M16@1154.87,1428.84 v1(1170.62,1413.09) U3.N16@1154.87,1397.34 U3.P16@1154.87,1365.84 v1(1170.61,1350.1) U3.R16@1154.87,1334.35 v1(1170.62,1318.6) U3.T16@1154.87,1302.85 v1(1170.62,1287.1) U3.U16@1154.87,1271.36 v1(1170.62,1255.61) ; v2@1542.35,1295 v2(1542,1295) 1545,1298 C77.1@1568.82,1298 ; v2(1871.76,876.79) 1881.41,876.79 1896.1,862.1 U1.13@1896.1,845.79
  Signal Layer 2 w15: v2(1697,1205) 1744,1158 1744,1004.55 v2(1871.76,876.79)
  Bottom Layer w10: v1(1170.62,1255.61) 1176.2,1261.2 C67.1@1176.2,1270.89 1176.2,1281.52 v1(1170.62,1287.1) 1176.2,1292.69 C73.1@1176.2,1302.78 1176.2,1313.02 v1(1170.62,1318.6) 1176.6,1324.58 C74.1@1176.6,1334.27 1176.6,1344.11 v1(1170.61,1350.1) 1177.78,1357.28 C75.1@1177.78,1381.52 1177.78,1405.93 v1(1170.62,1413.09) 1176.2,1418.68 C68.1@1176.2,1428.76 1176.2,1439 v1(1170.62,1444.58) 1176.2,1450.17 C72.1@1176.2,1460.26 1176.2,1470.5 v1(1170.62,1476.08) 1176.2,1481.67 C69.1@1176.2,1491.75 1176.2,1502 v1(1170.62,1507.58) 1176.2,1513.17 C70.1@1176.2,1523.25 1176.2,1533.49 v1(1170.62,1539.07) 1176.2,1544.66 C71.1@1176.2,1554.75 ; v2(1542,1295) 1545,1298 C76.1@1568.82,1298
  other v2: 1764,1205 1828,1205 1892.24,1205
WDOG-B: U3.T4 | length 22.3
  Top Layer w7: v1(761.17,1287.1) U3.T4@776.92,1302.85
WIFI-PWREN: J2.22 U3.D16 | length 1860.3
  Top Layer w10: U3.D16@1154.87,1680.8 v1(1170.62,1696.55)
  Signal Layer 1 w4.5: v2(416.35,2035.65) v2(416.35,2226)
  Bottom Layer w4.7: J2.22@236.22,1751.97 346.41,1751.97 432,1837.55 432,2020 v2(416.35,2035.65) ; v2(416.35,2226) 984,2226 1005.7,2204.3 1069.7,2204.3 1084,2190 1084,2133.13 1140,2077.13 1140,2013.45 1155.27,1998.18 1155.27,1711.9 v1(1170.62,1696.55)
ZQPAD: R40.1 U3.AE17 | length 62.4
  Top Layer w4.7: U3.AE17@1186.36,1019.39 1186.36,977.36 1191.38,972.34 R40.1@1191.38,959.1
pads on no net: Designator13. Designator14. Designator15. Designator16. Designator17. Designator18. J1.25 J1.26 J1.27 J1.29 J1.31 J1.33 J1.35 J1.40 J1.42 J1.44 J1.46 J1.48 J1.50 J2.14 J2.15 J4.1 J4.3 J4.5 J4.6 J4.7 J4.8 J4.9 J4.10 J4.11 J4.12 J4.13 J4.14 J4.15 J4.16 J4.17 J4.18 J4.19 J4.20 J4.21 J4.22 J4.24 J4.26 J4.28 U1.2 U1.16 U1.17 U1.18 U1.19 U1.21 U1.26 U1.27 U1.28 U1.33 U1.39 U1.44 U1.46 U3.A9 U3.A10 U3.A11 U3.A21 U3.AA1 U3.AA2 U3.AA3 U3.AA4 U3.AA11 U3.AB1 U3.AB2 U3.AB17 U3.AD17 U3.B8 U3.B9 U3.B10 U3.B11 U3.B21 U3.C5 U3.C8 U3.C15 U3.D1 U3.D2 U3.D5 U3.D20 U3.E1 U3.E2 U3.E3 U3.E4 U3.E15 U3.F1 U3.F2 U3.F3 U3.F4 U3.G1 U3.G2 U3.H1 U3.H2 U3.H3 U3.H4 U3.H19 U3.H24 U3.J23 U3.J24 U3.N19 U3.N22 U3.R2 U3.R20 U3.R21 U3.T22 U3.T23 U3.T24 U3.T25 U3.U25 U3.W4 U3.W6 U3.Y1 U3.Y2 U3.Y3 U3.Y4 U7.J1 U7.J9 U7.L1 U7.L9 U8.J1 U8.J9 U8.L1 U8.L9 U9.J1 U9.J9 U9.L1 U9.L9 U10.J1 U10.J9 U10.L1 U10.L9 U11.A4 U11.A6 U11.A9 U11.A11 U11.AA1 U11.AA2 U11.AA7 U11.AA8 U11.AA9 U11.AA10 U11.AA11 U11.AA12 U11.AA13 U11.AA14 U11.AE1 U11.AE14 U11.AG2 U11.AG13 U11.AH4 U11.AH6 U11.AH9 U11.AH11 U11.B2 U11.B13 U11.D1 U11.D14 U11.H1 U11.H2 U11.H6 U11.H7 U11.H8 U11.H9 U11.H10 U11.H11 U11.H12 U11.H13 U11.H14 U11.J1 U11.J7 U11.J8 U11.J9 U11.J10 U11.J11 U11.J12 U11.J13 U11.J14 U11.K1 U11.K3 U11.K5 U11.K7 U11.K8 U11.K9 U11.K10 U11.K11 U11.K12 U11.K13 U11.K14 U11.L1 U11.L2 U11.L3 U11.L4 U11.L12 U11.L13 U11.L14 U11.M1 U11.M2 U11.M3 U11.M5 U11.M8 U11.M9 U11.M10 U11.M12 U11.M13 U11.M14 U11.N1 U11.N2 U11.N3 U11.N10 U11.N12 U11.N13 U11.N14 U11.P1 U11.P2 U11.P3 U11.P10 U11.P12 U11.P13 U11.P14 U11.R1 U11.R2 U11.R3 U11.R5 U11.R12 U11.R13 U11.R14 U11.T1 U11.T2 U11.T3 U11.T5 U11.T12 U11.T13 U11.T14 U11.U1 U11.U2 U11.U3 U11.U6 U11.U7 U11.U10 U11.U12 U11.U13 U11.U14 U11.V1 U11.V2 U11.V3 U11.V12 U11.V13 U11.V14 U11.W1 U11.W2 U11.W3 U11.W7 U11.W8 U11.W9 U11.W10 U11.W11 U11.W12 U11.W13 U11.W14 U11.Y1 U11.Y3 U11.Y6 U11.Y7 U11.Y8 U11.Y9 U11.Y10 U11.Y11 U11.Y12 U11.Y13 U11.Y14 Y1.2 Y1.4
copper on no net:
  other v1: 1052.33,126.39 994.83,201.39 1467.33,271.39 1524.83,271.39 957.33,458.89 1527.38,481.34 529.83,551.39 772.33,583.89 1108.63,908.89

## Polygon pours and split planes (outlines as drawn)
NetL3_1 on Top Layer "Top Layer-No Net" (solid, pour order 30): 1668.49,1043.17 1652.87,1027.55 1652.87,962.42 1652.87,942.08 1665.36,929.58 1675.26,919.68 1716.49,919.68 1932.63,919.68 1935.47,916.84 1935.47,942.17 1921.26,956.38 1904.37,973.27 1904.37,1005.81 1904.37,1032.86 1894.06,1043.17
NetL2_1 on Top Layer "Top Layer-No Net" (solid, pour order 34): 1968.5,1037.07 2153.22,1037.07 2161.45,1028.84 2161.45,950.79 2152.83,942.17 2059.43,942.17 2054.37,937.1 2015.03,937.1 1999.36,921.43 1999.36,870.98 1994.53,866.14 1977.13,866.14 1971.41,871.86 1971.41,903.34 1967.6,903.34 1945.11,925.83 1949,929.72 1949,948.03 1949,950.83 1939.32,960.5 1939.32,1032.4 1944,1037.07
NetL2_1 on Top Layer "Top Layer-No Net" (solid, pour order 36): 1945.11,925.83 1945.11,988.67 1954.37,997.92 1993.52,1037.07 2154.2,1037.07 2175.68,1037.07 2180.34,1032.41 2180.34,957.64 2170.74,948.03 2165.04,942.34 2153,942.34 2005.75,942.34 1979.68,916.27 1954.67,916.27 1949.51,921.43
VDDSOC-SW1C on Top Layer "Top Layer-No Net" (solid, pour order 38): 1693.76,1216 1896.73,1216 1904.37,1208.36 1904.37,1088.59 1901.34,1085.56 1683.75,1085.56 1671.56,1097.75 1671.56,1205.84 1674.08,1208.36
VDDARM-SW1AB on Top Layer "Top Layer-No Net" (solid, pour order 39): 1964.21,1216 2194.56,1216 2204.72,1205.84 2204.72,1102.16 2191.15,1088.59 1935.06,1088.59 1925.89,1097.75 1925.89,1208 1933.89,1216
NetL4_1 on Top Layer "Top Layer-No Net" (solid, pour order 44): 1708,708.66 1810.89,708.66 1823.98,695.57 1823.98,682.98 1819,678 1787.86,678 1779,669.14 1779,511.27 1803,487.27 1824.27,466 1880,466 1917.76,466 1931,452.76 1931,359.5 1925,353.5 1703.5,353.5 1696,361 1696,698.66 1706,708.66
NetL1_1 on Top Layer "Top Layer-No Net" (solid, pour order 48): 1987,499.26 2007.87,499.26 2015,492.13 2018,489.13 2018,482.05 2018,480 2027,471 2046.9,451.1 2165.04,451.1 2185.9,451.1 2193,444 2193,362.5 2189,358.5 1965.5,358.5 1958,366 1958,456 1978,476 1981.99,479.99 1981.99,494.59 1981.99,496.4 1984.84,499.26
P1V5-DDR-SW3 on Top Layer "Top Layer-No Net" (solid, pour order 50): 1995,315 2228,315 2233,310 2233,199 2226,192 1975,192 1968,199 1968,309 1974,315
P3V0-VDDHIGH-SW2 on Top Layer "Top Layer-No Net" (solid, pour order 52): 1736,314 1925.97,314 1932.63,307.34 1932.63,194.86 1925.77,188 1713,188 1707,194 1707,308 1713,314
GND on Top Layer "Top Layer-No Net" (solid, remove dead copper, pour order 32): 0,0 2595,0 2595,2358.78 2598.43,2362.2 0,2362.2
VDDSOC-SW1C on Bottom Layer "Top Layer-No Net" (solid, pour order 49): 1697,1217 1897,1217 1904,1210 1904,1201.87 1888,1185.87 1870,1167.87 1870,1157 1857.97,1144.97 1839.81,1144.97 1678.03,1144.97 1672,1151 1672,1210 1679,1217
VDDARM-SW1AB on Bottom Layer "Top Layer-No Net" (solid, pour order 51): 1961,1216 2196,1216 2206,1206 2206,1150 2200,1144 1911,1144 1906,1149 1906,1186 1919,1199 1936,1216 1947,1216
MAIN-POWER on Bottom Layer "Top Layer-No Net" (solid, pour order 54): 1820.54,955 2046.76,955 2049.76,952 2049.76,910.76 2031,892 2026,887 2026,874.07 2026,839.23 2023.77,837 1907.86,837 1903.86,841 1903.86,873.14 1883,894 1868,909 1835,909 1816.42,909 1814,911.42 1812,913.42 1812,950 1812,952 1815,955
GND on Bottom Layer "Top Layer-No Net" (solid, pour order 55): 1709,1127 2205,1127 2212,1120 2212,985 2204,977 2202.61,975.61 1705,975.61 1700.14,975.61 1690,985.75 1690,1120 1697,1127
MAIN-POWER on Bottom Layer "Top Layer-No Net" (solid, pour order 56): 1786,675.32 1853.35,675.32 1860.68,668 1862,666.68 1862,648 1862,604.13 1843.87,586 1838.96,581.09 1812,581.09 1763.91,581.09 1757,588 1757,662.32 1770,675.32
MAIN-POWER on Bottom Layer "Top Layer-No Net" (solid, pour order 57): 1956.61,548 2036.34,548 2039,545.34 2044,540.34 2044,510 2044,478.61 2038,472.61 2038,419.95 2029,410.95 1945.05,410.95 1938,418 1938,480.61 1945,487.61 1945,540 1953,548
GND on Bottom Layer "Top Layer-No Net" (solid, pour order 58): 1735.83,281.83 2227.83,281.83 2231,285 2231,450.96 2216.96,465 2171.66,465 2166,459.34 2166,403.54 2159.88,397.41 2104.2,397.41 2094,407.61 2094,469.17 2090,473.17 2053.72,473.17 2052,471.45 2049,468.45 2049,428 2049,410 2042,403 2035,396 1945,396 1930.15,396 1919,407.15 1919,469.17 1916,469.17 1879,469.17 1873,468.82 1719.93,468.82 1715,463.89 1715,288.83 1722,281.83
P3V0-VDDHIGH-SW2 on Bottom Layer "Top Layer-No Net" (solid, pour order 42): 1793,267 1889,267 1895,261 1895,194.34 1890,189.34 1737.3,189.34 1732.65,194 1732.65,263.03 1736.61,267
P1V5-DDR-SW3 on Bottom Layer "Top Layer-No Net" (solid, pour order 47): 1959,265 2233,265 2239,259 2239,200.34 2233,194.34 1934.66,194.34 1927,202 1927,256.11 1933.89,263 1935.89,265 1939,265
GND on Bottom Layer "Top Layer-No Net" (solid, pour order 53): 1800,837.04 1835.3,837.04 1841,831.34 1844.34,828 2050,828 2119.95,828 2129,818.95 2139,808.95 2139,763 2139,761 2134,756 2130,752 2130,633 2130,630.85 2136.85,624 2140,620.85 2140,612.58 2140,560 2138,558 2108,558 2100,566 2097,569 2058,569 2050,569 2045,564 2037.74,556.74 2026,556.74 1855.26,556.74 1852,560 1852,579.04 1864,591.04 1874.5,600 1874.5,630.85 1874.5,659 1874.5,734.5 1841,768 1794.5,814.5 1793.5,833.5 1796,837 1797,837
GND on Bottom Layer "Top Layer-No Net" (solid, remove dead copper, pour order 33): 0,0 2598.43,0 2598.43,2362.2 0,2362.2
VDDHIGH-CAP on Signal Layer 2 "Signal Layer 2-No Net" (solid, pour order 41): 838.56,1367.17 833.5,1372.24 833.5,1385.85 833.5,1403.74 792.66,1444.58 787.74,1444.58 772.33,1460 728.19,1504.14 728.19,1553.49 795.49,1553.49 804.85,1544.13 883,1465.98 883,1370 875.29,1362.29 850.59,1362.29 843.45,1362.29 838.56,1367.17
VDDHIGH-CAP on Signal Layer 2 "Signal Layer 2-No Net" (solid, pour order 37): 752.61,1644 769.38,1644 778.38,1635 791.31,1622.07 929,1622.07 960.93,1622.07 971,1612 987,1596 1015,1596 1025.56,1596 1041,1611.44 1042.24,1610.2 1050.45,1610.2 1060.8,1610.2 1063,1608 1066,1605 1066,1599 1066,1178 1061,1173 1037.38,1173 856,1173 848,1181 838.39,1190.61 838.39,1218.79 838.39,1238.35 855.65,1255.61 867.38,1267.34 867.38,1291 867.38,1338.36 855.65,1350.09 838.56,1367.17 838.56,1396 838.56,1405.51 796.07,1448 728.19,1515.89 728.19,1621.32 728.19,1637.06 735.13,1644
NVCC-RMII on Signal Layer 2 "Signal Layer 2-No Net" (solid, pour order 31): 1260,1715 1406.38,1715 1422.38,1699 1443,1678.38 1443,1669.31 1443,1658.41 1422.59,1638 1397.59,1613 1355,1613 1282.39,1613 1260.39,1591 1247.01,1577.62 1221,1577.62 1192.01,1577.62 1183,1586.64 1183,1709 1189,1715
P3V0-VDDHIGH-SW2 on Signal Layer 1 "Top Layer-No Net" (solid, pour order 46): 2401,1197 2424,1174 2424,1137 2424,1108 2396,1080 2372.41,1056.41 2372.41,1034 2308,969.59 2251,912.59 2251,873.35 2251,824 2242,815 2228.77,801.77 2228.77,685.32 2228.77,617.97 2177,566.19 2149.15,538.34 2022,538.34 1972.82,587.53 1972.82,623.19 1972.82,799.82 2370,1197
P3V0-VDDHIGH-SW2 on Signal Layer 1 "Top Layer-No Net" (solid, pour order 43): 1765,479.34 1765,670.2 1783.78,688.98 1787,692.2 1787,776.48 1787,1015.66 1811.34,1040 1814,1042.66 1814,1063.51 1814,1087.96 1829,1102.96 1832.96,1099 2221,1099 2221,1060.38 2174.62,1014 2066,905.38 2066,830 2066,607.92 1935.53,477.45 1888.08,430 1788.37,430 1780.34,430 1765,445.34
P3V0-VDDHIGH-SW2 on Signal Layer 1 "Top Layer-No Net" (solid, pour order 40): 2314,1205 2393,1205 2401,1197 2403,1195 2403,1175 2403,1158 2321,1076 2086,841 2086,718.75 2086,594.95 2024.05,533 2014,522.95 2014,445.34 2014,264.94 1970,220.94 1915.06,166 1883,166 1743,166 1723,186 1723,308.34 1751,336.34 1765,350.34 1765,479.84 1773.16,488 1841,488 1845,488 1863,506 1866,509 1866,522 1866,716.2 1842.2,740 1837,745.2 1837,834 1837,973 1874,1010 1895.34,1031.34 2007,1031.34 2131.12,1031.34 2228.77,1129 2304.77,1205 2310,1205
PMIC-VSNVS on Signal Layer 1 "Top Layer-No Net" (solid, pour order 35): 591,1919 812,1919 983,2090 994,2101 1041,2101 1108,2101 1133,2126 1140.13,2133.13 1140.13,2173 1066.32,2246.81 1066.32,2271 1072.32,2277 1096.31,2277 1156.31,2217 1168,2217 1181.12,2230.12 1181.12,2258 1181.12,2281 1139.12,2323 1137.12,2325 1109,2325 806,2325 560,2079 557,2076 557,1943 557,1928.29 566,1919.29
VDDSOC-CAP on Signal Layer 1 "Signal Layer 2-No Net" (solid, pour order 45): 1076,1611 1098.7,1611 1107.63,1602.07 1119.7,1590 1135,1590 1147,1590 1155,1582 1158,1579 1158,1508 1158,1181.24 1150.38,1173.62 876.89,1173.62 873,1177.51 868.12,1182.39 868.12,1226 868.12,1337.62 855.65,1350.09 836.95,1368.79 836.95,1390 836.95,1566.95 843,1573 849.07,1579.07 856,1579.07 876.57,1579.07 891.38,1564.26 897.64,1558 959,1558 1024.04,1558 1068,1601.96
GND on GND1 (split plane): 2578.33,20.1 20.1,20.1 20.1,2342.11 2578.33,2342.11
PMIC-VSNVS on POWER1 (split plane): 1284.37,2104.42 1284.37,1849.02 1060.4,1625.05 992.95,1557.6 990.56,1555.22 934.78,1611 941.18,1617.4 1079.74,1755.95 1080.84,1757.61 1081.23,1759.56 1081.23,1808.02 1191.6,1918.4 1192.71,1920.05 1193.1,1922 1193.1,2053 1192.71,2054.95 1191.6,2056.6 1185.6,2062.6 1183.95,2063.71 1182,2064.1 1069,2064.1 1068.1,2063.92 1068.1,2132 1068.1,2161.5 1227.29,2161.5
NetC114_1 on POWER1 (split plane): 1182.9,2050.89 1182.9,1924.11 1072.53,1813.74 1071.42,1812.08 1071.03,1810.13 1071.03,1761.67 933.97,1624.61 933.97,1624.6 927.57,1618.21 860.75,1685.04 860.75,1725.93 1066.6,1931.79 1067.71,1933.44 1068.1,1935.39 1068.1,2050.89 1071.11,2053.9 1179.89,2053.9
VDDARM-CAP on POWER1 (split plane): 1058.9,1551.89 1058.9,1404.28 1058.9,1265.7 955.24,1265.7 955.24,1401.86 955.24,1413.09 955.24,1505.47 970.6,1520.84 1000.16,1550.4 1030.28,1580.51
P1V5-DDR-SW3 on POWER1 (split plane): 1257.96,1311.47 1286.51,1282.92 1286.51,1192.62 1286.86,1190.01 1287.86,1187.58 1289.47,1185.49 1289.48,1185.48 1291.57,1183.87 1294,1182.87 1296.61,1182.52 1492.34,1182.52 1581,1093.87 1608.42,1066.45 1608.29,1065.51 1608.29,754.98 1608.29,725.62 1608.64,723.01 1609.64,720.58 1611.25,718.49 1788.87,540.87 1789.87,539.87 1791.96,538.26 1794.39,537.26 1797,536.91 2161.82,536.91 2230.91,467.82 2230.91,40.09 510.09,40.09 510.09,637.61 509.74,640.22 509.33,641.23 508.74,642.66 507.13,644.75 485.09,666.79 485.09,843.39 485.09,959.93 707.69,1182.54 855.66,1182.54 858.27,1182.88 860.7,1183.89 862.79,1185.49 922.83,1245.53 1145,1245.53 1147.61,1245.87 1150.04,1246.88 1152.13,1248.48 1215.12,1311.47 1230.56,1326.91 1242.52,1326.91
P3V0-VDDHIGH-SW2 on POWER1 (split plane): 1057.9,2132 1057.9,2053 1057.9,1937.5 852.04,1731.64 850.94,1729.99 850.55,1728.04 850.55,1682.93 850.94,1680.98 852.04,1679.32 923.97,1607.4 923.97,1607.39 983.35,1548.01 963.4,1528.05 948.03,1512.68 920.76,1512.68 873.89,1559.56 872.23,1560.66 870.28,1561.05 808.11,1561.05 734.77,1634.39 734.77,1869.27 917,2051.51 918.11,2053.17 918.5,2055.12 918.5,2126.76 953.24,2161.5 1057.9,2161.5
P3V3-PERI on POWER1 (split plane): 2558.34,40.09 2251.09,40.09 2251.09,472 2250.74,474.61 2249.74,477.04 2248.13,479.13 2173.13,554.13 2171.04,555.73 2168.61,556.74 2166,557.09 1801.18,557.09 1628.46,729.8 1628.46,754.98 1628.46,1061.43 1629.74,1063.09 1630.74,1065.52 1631.09,1068.13 1630.74,1070.74 1629.74,1073.17 1628.13,1075.26 1595.26,1108.13 1503.65,1199.74 1501.56,1201.34 1499.13,1202.35 1496.52,1202.69 1306.68,1202.69 1306.68,1287.1 1306.34,1289.71 1305.33,1292.14 1303.73,1294.23 1272.22,1325.74 1253.83,1344.13 1251.74,1345.74 1249.31,1346.74 1246.7,1347.09 1226.39,1347.09 1223.78,1346.74 1221.34,1345.74 1219.25,1344.13 1200.86,1325.74 1140.82,1265.7 1069.1,1265.7 1069.1,1404.28 1069.1,1554 1068.71,1555.95 1067.6,1557.6 1037.49,1587.72 1067.6,1617.84 1293.07,1843.31 1294.18,1844.96 1294.56,1846.91 1294.56,2106.53 1294.18,2108.48 1293.07,2110.14 1233,2170.2 1231.35,2171.31 1229.4,2171.7 951.13,2171.7 949.17,2171.31 947.52,2170.2 909.8,2132.48 908.69,2130.83 908.3,2128.87 908.3,2057.23 726.06,1874.99 724.96,1873.34 724.57,1871.38 724.57,1633.56 724.57,1632.28 724.96,1630.33 726.06,1628.68 802.4,1552.35 804.05,1551.24 806,1550.85 868.17,1550.85 915.05,1503.98 916.7,1502.87 918.65,1502.49 945.04,1502.49 945.04,1413.09 945.04,1401.86 945.04,1265.7 918.65,1265.7 916.04,1265.36 913.61,1264.35 911.52,1262.75 851.48,1202.71 703.51,1202.71 700.9,1202.37 698.47,1201.36 696.38,1199.76 467.87,971.24 466.27,969.15 465.26,966.72 464.91,964.11 464.91,843.39 464.91,662.61 465.26,660 466.27,657.57 467.87,655.48 489.91,633.44 489.91,40.09 40.09,40.09 40.09,2322.12 2558.34,2322.12
P3V0-VDDHIGH-SW2 on POWER2 (split plane): 2479.9,2069.89 2479.9,1478.88 2476.46,1477.45 2473.1,1475.4 2470.11,1472.84 2467.55,1469.85 2465.5,1466.5 2463.99,1462.86 2463.07,1459.03 2462.77,1455.11 2462.77,1454.72 2463.07,1450.8 2463.99,1446.97 2465.5,1443.34 2467.55,1439.98 2470.11,1436.99 2473.1,1434.44 2476.46,1432.38 2479.9,1430.95 2479.9,1339.11 2441.28,1300.49 2440.17,1298.83 2439.78,1296.88 2439.78,1165.09 2315.1,1165.09 2315.1,1910.47 2314.71,1912.42 2313.6,1914.08 2286.08,1941.6 2284.42,1942.71 2282.47,1943.1 986.41,1943.1 986.41,2142.83 986.41,2184.2 1012.11,2209.9 2339.89,2209.9
VDDARM-SW1AB on POWER2 (split plane): 2304.9,1908.36 2304.9,1165.09 1917.34,1165.09 1917.34,1538.95 1916.95,1540.9 1915.84,1542.55 1884.23,1574.17 1882.58,1575.27 1880.63,1575.66 1182.25,1575.66 1180.3,1575.27 1178.65,1574.17 1135.51,1531.03 1134.41,1529.38 1134.02,1527.43 1134.02,1507.58 1134.02,1202.71 893.17,1202.71 893.17,1474.89 920.76,1502.49 950.14,1502.49 952.09,1502.87 953.74,1503.98 985.23,1535.47 986.34,1537.12 986.72,1539.07 986.72,1570.57 986.34,1572.52 985.23,1574.17 953.72,1605.68 952.07,1606.78 950.12,1607.17 920.75,1607.17 892.25,1635.68 892.25,1841.73 983.42,1932.9 2280.36,1932.9
MAIN-POWER on POWER2 (split plane): 2558.34,819.09 2524,819.09 2521.39,818.74 2518.96,817.73 2516.87,816.13 2497.91,797.18 2442.09,797.18 2427.13,812.13 2425.04,813.73 2422.61,814.74 2420,815.09 2386,815.09 2383.39,814.74 2382.17,814.24 2380.96,813.73 2378.87,812.13 2360.82,794.09 2301,794.09 2298.39,793.74 2295.96,792.73 2293.87,791.13 2249.87,747.13 2248.26,745.04 2247.26,742.61 2246.91,740 2246.91,574.52 2149.48,477.09 1956.07,477.09 1956.07,497.47 1955.73,500.08 1954.72,502.51 1953.12,504.6 1907.59,550.13 1905.5,551.73 1903.06,552.74 1900.45,553.09 1834.42,553.09 1650.76,736.74 1648.67,738.35 1646.24,739.36 1643.63,739.7 1612.79,739.7 1611.35,741.13 1554.09,798.4 1554.09,976.78 1553.74,979.39 1552.74,981.83 1551.13,983.91 1436.84,1098.2 1483.55,1144.91 2558.34,1144.91
VDDSOC-SW1C on POWER2 (split plane): 1907.14,1536.84 1907.14,1165.09 1479.37,1165.09 1476.76,1164.74 1474.33,1163.74 1472.24,1162.13 1422.58,1112.47 1366.79,1168.26 1364.7,1169.86 1362.27,1170.87 1359.66,1171.21 1300.78,1171.21 1272.23,1199.76 1270.14,1201.36 1267.71,1202.37 1265.1,1202.71 1144.22,1202.71 1144.22,1525.31 1184.37,1565.46 1878.51,1565.46